# Altium PCB DIP.PcbDoc
Units mm, origin at the board's own origin, x right, y up, seen from the top; angles counter-clockwise.
Board outline 138.43 x 69.22 mm, 2 copper layers (Top Layer, Bottom Layer); 23 components, 20 nets, 83 pads, 5 vias.
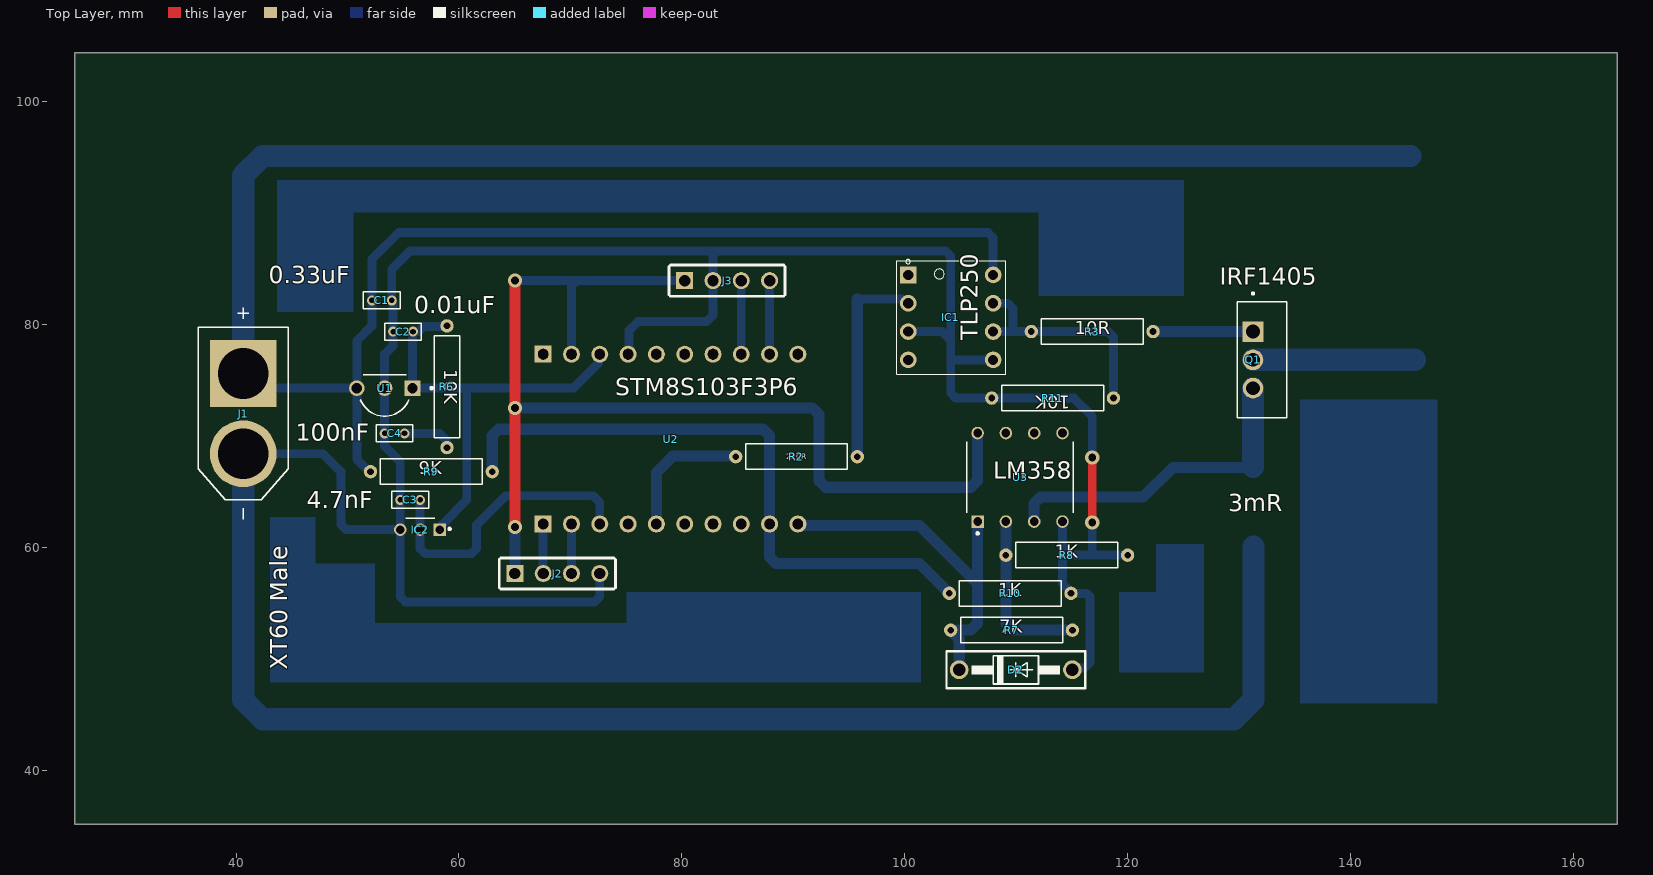
[diagram p0: Top Layer view]
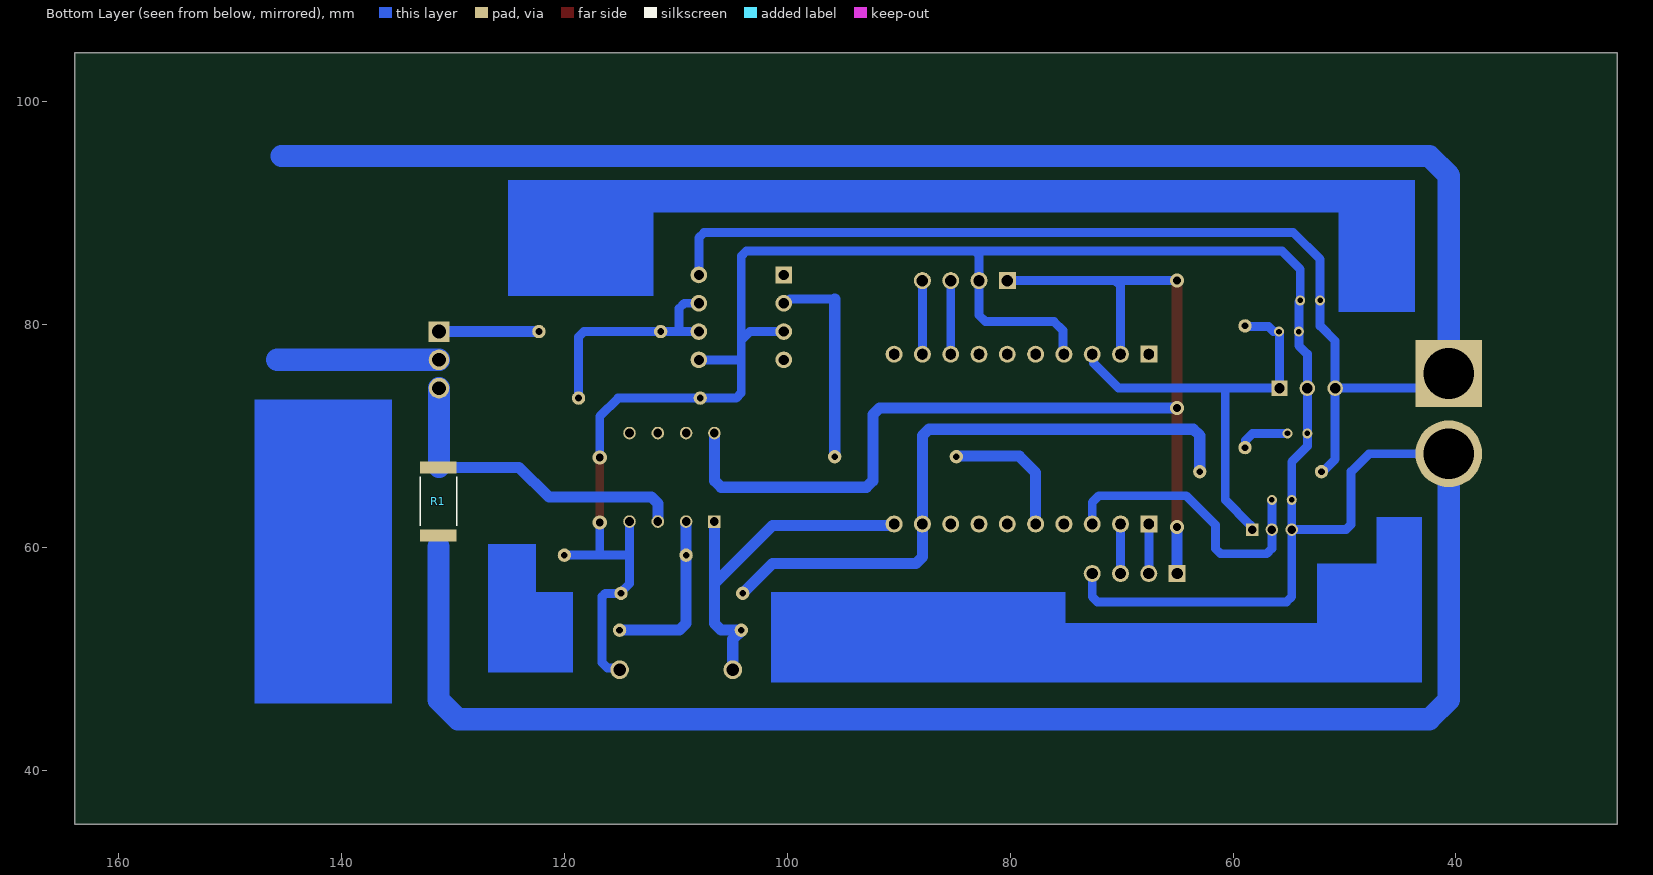
[diagram p1: Bottom Layer view, seen from below]

## Layer stack, top to bottom
Top Solder: solder mask 0.0102, Solder Resist, Dk 3.5
Top Layer: signal copper 0.0356
Dielectric 1: dielectric 0.32, FR-4, Dk 4.8
Bottom Layer: signal copper 0.0356
Bottom Solder: solder mask 0.0102, Solder Resist, Dk 3.5

## Board outline
25.527,35.179 25.527,104.394 163.957,104.394 163.957,35.179

## Design rules (kind name [scope] priority, off if disabled: settings)
Clearance [All] p1: gap=0.254 ignorepadtopadclearanceinfootprint=FALSE
PolygonConnect [All] p1: connectstyle=Relief reliefconductorwidth=0.254 reliefentries=4 polygonreliefangle="90 Angle" airgapwidth=0.254
RoutingVias [All] p1: holewidth=0.711 width=1.27 viastyle="Through Hole" minholewidth=0.711 minwidth=1.27 maxholewidth=0.711 maxwidth=1.27
SolderMaskExpansion [All] p1: expansion=0.102 istentingtop=FALSE
SupplyNets "Schematic Supply Nets" [InNet('GND')] p1: voltage=0.000
Width [All] p1: maxlimit=5 minlimit=0.254 preferedwidth=1 minimp=50.000000 maximp=50.000000 favimp=50.000000
30 further rules are at their usual default settings.

## Components (designator, comment, footprint, x,y, rotation, side; value= is the part's Value field where it differs from the comment)
C1 "0.33uF" CER-DIP-CAP 53.086,82.169 r180 top
C2 "0.01uF" CER-DIP-CAP 54.991,79.375 r0 top
C3 "4.7nF" CER-DIP-CAP 55.626,64.262 r0 top
C4 "100nF" CER-DIP-CAP 54.229,70.231 r0 top
D2 "3V3 1W zener" 1N4001 110.49,49.022 r0 top
IC1 "TLP250" DIP-8 104.775,80.645 r0 top
IC2 "US1881" UA 56.515,61.849 r180 top
J1 "XT60 Male" "XT60 Male Pin" 40.64,72.009 r270 top
J2 "1x4 CONN" CON1x4_2.54MM 65.024,57.658 r0 top
J3 "1x4 CONN" CON1x4_2.54MM 80.264,83.947 r0 top
Q1 "IRF1405" TO-220 132.08,76.835 r270 top
R1 "3mR" "RES 2512 SMD" 131.318,64.135 r90 bottom
R2 "220R" "RES DIP" 90.297,68.15 r0 top
R3 "10R" "RES DIP" 116.84,79.375 r0 top
R6 "10K" "RES DIP" 58.928,74.422 r270 top
R7 "7K" "RES DIP" 109.601,52.578 r0 top
R8 "1K" "RES DIP" 114.554,59.309 r0 top
R9 "9K" "RES DIP" 57.531,66.802 r180 top
R10 "1K" "RES DIP" 109.474,55.88 r180 top
R11 "10K" "RES DIP" 113.284,73.406 r180 top
U1 "TO-92 LM78L05" "TO-226 TO-92" 53.34,74.295 r180 top
U2 "STM8S103F3P6" "STM8S103F3P6 BLUE PILL" 67.564,62.103 r0 top
U3 "LM358" PDIP-8 110.363,66.294 r90 top

## Footprints (in the part's own frame and the unit in brackets; to place one, negate y for a bottom-side part, rotate by r counter-clockwise, add the part's x,y. Pads: shape width x height; smd on the part's side, far side on the other; paste and mask are expansions set on the pad)
1N4001 [mil]
  round 66 hole 44: A(180,0) C(-220,0)
  silkscreen extent -265,-65 225,65, body extent -236,-53 196,53, height 106
CER-DIP-CAP [mm]
  round 0.9 hole 0.5: 1(-0.889,0) 2(0.889,0)
  silkscreen extent -1.65,-0.76 1.65,0.76, body extent -1.51,-0.58 1.49,0.57, height 4
CON1x4_2.54MM [mil]
  rect 60x60 hole 40.16: 1(0,0)
  round 60 hole 40.16: 2(100,0) 3(200,0) 4(300,0)
  silkscreen extent -55,-55 355,55, body extent -50,-50 350,50, height 350
DIP-8 [mm]
  rect 1.5x1.5 / inner round 1.5 / far side rect 1.5x1.5 hole 0.9: 1(-4.445,3.81)
  round 1.5 hole 0.9: 2(-4.445,1.27) 3(-4.445,-1.27) 4(-4.445,-3.81) 5(3.175,-3.81) 6(3.175,-1.27) 7(3.175,1.27) 8(3.175,3.81)
  silkscreen extent -5.46,-5.08 4.32,5.2, body extent -4.44,-4.83 3.43,4.83, height 4.85
PDIP-8 [mm]
  rect 1.13x1.13 / inner round 1.13 / far side rect 1.13x1.13 hole 0.78: 1(-3.97,3.81)
  round 1.13 hole 0.78: 2(-3.97,1.27) 3(-3.97,-1.27) 4(-3.97,-3.81) 5(3.97,-3.81) 6(3.97,-1.27) 7(3.97,1.27) 8(3.97,3.81)
  silkscreen extent -5.13,-4.79 3.18,4.79, body extent -3.94,-4.79 3.94,4.79, height 5.08
"RES 2512 SMD" [mm]
  rect 1.07x3.27 smd: 1(-3.055,0) 2(3.055,0)
  silkscreen extent -2.2,-1.63 2.2,1.63, body extent -3.17,-1.6 3.17,1.6, height 0.65
"RES DIP" [mm]
  round 1.2 hole 0.6: 1(-5.461,0) 2(5.461,0)
  silkscreen extent -4.57,-1.14 4.57,1.14, body extent -5.93,-1.3 5.93,1.3, height 2.8
"STM8S103F3P6 BLUE PILL" [mil]
  rect 60x60 hole 36 slot 37.8 at 90 deg: 1(0,0) 11(0,600)
  round 60 hole 36 slot 37.8 at 90 deg: 2(100,0) 3(200,0) 4(300,0) 5(400,0) 6(500,0) 7(600,0) 8(700,0) 9(800,0) 10(900,0) 12(100,600) 13(200,600) 14(300,600) 15(400,600) 16(500,600) 17(600,600) 18(700,600) 19(800,600) 20(900,600)
  body extent -60,-64 1126,664, height 693
TO-220 [mm]
  rect 1.845x1.845 / inner round 1.845 / far side rect 1.845x1.845 hole 1.23: 1(-2.54,-0.81)
  round 1.845 hole 1.23: 2(0,-0.81) 3(2.54,-0.81)
  silkscreen extent -6.06,-2.22 5.21,2.22, body extent -5.21,-2.22 5.21,2.22, height 19.3
"TO-226 TO-92" [mm]
  rect 1.4x1.4 / inner round 1.4 / far side rect 1.4x1.4 hole 0.93: 1(-2.5,0)
  round 1.4 hole 0.93: 2(0,0) 3(2.5,0)
  silkscreen extent -4.3,-1.19 2.18,2.5, body extent -2.74,-1.27 2.74,2.33, height 8.09
UA [mm]
  rect 1.12x1.12 / inner round 1.12 / far side rect 1.12x1.12 hole 0.77: 1(-1.778,0.254)
  round 1.12 hole 0.77: 2(0,0.254) 3(1.778,0.254)
  silkscreen extent -2.75,-0.75 1.31,0.28, body extent -2.05,-0.93 2.05,0.57, height 4.95
"XT60 Male Pin" [mm]
  round 6 hole 4.55: N(3.6,0)
  rect 6x6 / inner round 6 / far side rect 6x6 hole 4.55: P(-3.6,0)
  silkscreen extent -9.5,-4.05 9.5,4.05, body extent -7.75,-4.05 7.75,4.05, height 16.5

## Part data
C1 C2 C3 C4: library part "CAP DIP"
D2: library part 1N4001, "Diode"
IC1: library part TLP250-DIP
J1: library part "XT60 Male Pin"
J2 J3: library part CON1x4_2.54mm
Q1: library part "TO-220 MOSFET"
R1: library part "RES SMD 2512 SHUNT"
R2 R3 R6 R7 R8 R9 R10 R11: library part "RES DIP"
U1: library part TO-92
U2: library part "STM8S103F3P6 BLUE PILL"
U3: library part "LM358 - DIP"

## Via types
v1: diameter 1.27, hole 0.711, Top Layer to Bottom Layer, 5 vias

## Nets (pads, with @x,y where several pads share a name; then routed paths per layer and width w, separated by ;. In a path a pad name is that pad's centre, name@x,y a point inside that pad or via, vN(x,y) a via of type N, cw(c..) or ccw(c..) an arc to the next point about the centre after c; other vN are vias at no path point)
3.3V: J2.1 J3.1 U2.12 U3.8 | length 100.8
  Top Layer w1: v1(65.024,61.849) v1(65.024,83.947)
  Bottom Layer w0.8: v1(65.024,83.947) 70.573,83.947 ; U2.12 70.104,83.478 70.573,83.947 ; J3.1 70.573,83.947
  Bottom Layer w1: J2.1 v1(65.024,61.849) ; v1(65.024,72.517) 91.743,72.517 92.329,71.931 92.329,65.991 92.915,65.405 105.967,65.405 106.553,65.991 U3.8
3S-6S: C1.2 IC1.8 J1.P R9.2 U1.3 | length 214.5
  Bottom Layer w0.8: J1.P 41.954,74.295 U1.3 ; R9.2 51.962,66.802 50.84,67.924 U1.3 ; IC1.8 107.95,87.796 107.481,88.265 54.61,88.265 52.197,85.852 C1.2 52.197,79.883 50.84,78.526 U1.3
  Bottom Layer w2: J1.P 40.64,93.366 42.397,95.123 145.415,95.123
5V: C2.2 IC2.1 R6.1 U1.1 U2.13 | length 40.5
  Bottom Layer w0.8: IC2.1 58.453,61.755 58.453,62.009 60.706,64.262 60.706,74.295 ; R6.1 58.89,79.845 56.836,79.845 56.366,79.375 C2.2 55.84,79.335 U1.1 60.706,74.295 ; U2.13 72.544,77.243 72.544,76.565 70.273,74.295 60.706,74.295
ADC1: R9.1 R10.2 U2.9 | length 57
  Bottom Layer w1: R9.1 62.992,70.026 63.578,70.612 87.298,70.612 87.884,70.026 U2.9 87.884,59.133 88.47,58.547 101.346,58.547 R10.2
ADC2: D2.C R7.1 U2.10 U3.1 | length 34.2
  Bottom Layer w1: U2.10@90.255,61.976 90.282,62.003 90.895,62.003 90.922,61.976 101.346,61.976 106.553,56.769 ; D2.C 104.902,51.762 104.14,52.524 R7.1 105.967,52.578 106.553,53.164 106.553,56.769 ; U3.1 106.553,56.769
GND: C1.1 C2.1 C3.1 C4.1 D2.A IC1.3 IC1.5 IC2.3 J1.N J2.4 J3.2 R1.1 R8.2 R10.1 R11.2 U1.2 U2.14 U3.4 | length 334.1
  Top Layer w0.8: v1(116.84,62.23) v1(116.84,68.072)
  Bottom Layer w0.8: J1.N 47.796,68.409 49.403,66.802 49.403,62.064 49.872,61.595 IC2.3 ; J2.4 72.644,55.587 72.175,55.118 55.206,55.118 54.737,55.587 IC2.3 ; U2.14 75.284,77.443 75.284,79.475 76.073,80.264 82.218,80.264 82.804,80.85 J3.2 82.804,86.233 83.185,86.614 ; IC1.3 103.378,79.375 104.14,78.613 ; IC1.5 104.267,76.835 104.14,76.708 ; U3.4 114.173,59.537 ; D2.A 115.23,49.19 116.158,49.19 116.627,49.658 116.627,55.585 116.332,55.88 R10.1 114.935,55.988 114.173,56.75 114.173,59.537 ; v1(116.84,62.23) 116.84,59.309 ; v1(116.84,68.072) 116.84,71.755 115.189,73.406 R11.2 104.609,73.406 104.14,73.875 104.14,76.708 ; R8.2 116.84,59.309 ; IC2.3 C3.1 54.737,67.691 53.34,69.088 C4.1 U1.2 53.34,77.343 54.102,78.105 C2.1 54.102,82.042 C1.1 53.975,84.963 55.626,86.614 83.185,86.614 ; 83.185,86.614 103.671,86.614 104.14,86.145 104.14,78.613 ; 104.14,76.708 104.14,78.613 ; 114.173,59.537 114.401,59.309 116.84,59.309
  Bottom Layer w2: J1.N 40.64,46.334 42.397,44.577 129.561,44.577 131.318,46.334 131.318,60.071
HallOut: C3.2 IC2.2 U2.3 | length 26.3
  Bottom Layer w0.8: C3.2 56.515,59.905 56.984,59.436 61.126,59.436 61.595,59.905 61.595,62.025 64.213,64.643 72.058,64.643 72.644,64.057 U2.3
Negative: Q1.2 | length 14.5
  Bottom Layer w2: Q1.2 145.796,76.835
NetC4_2: C4.2 R6.2 | length 4.7
  Bottom Layer w0.8: C4.2 58.242,70.231 58.89,69.583 58.89,68.999 R6.2
NetD1_A: 
NetQ1_1: Q1.1 R3.2 | length 9
  Bottom Layer w1: R3.2 Q1.1
NetR2_2: IC1.2 R2.2 | length 18.9
  Bottom Layer w0.8: 95.758,82.296 99.76,82.296 100.141,81.915 IC1.2
  Bottom Layer w1: R2.2 95.758,82.296
NetR3_1: IC1.6 IC1.7 R3.1 R11.1 | length 20.6
  Bottom Layer w0.8: IC1.6 109.664,79.375 ; IC1.7 109.259,81.915 109.728,81.446 109.728,79.438 109.664,79.375 ; R11.1 118.745,78.906 118.276,79.375 R3.1 109.664,79.375
NetR7_2: R7.2 R8.1 U3.2 | length 15.4
  Bottom Layer w1: U3.2 109.093,53.164 109.679,52.578 R7.2
Rx: J3.3 U2.18 | length 6.6
  Bottom Layer w0.8: U2.18 J3.3
SCL: J2.3 U2.2 | length 4.4
  Bottom Layer w0.8: J2.3 U2.2
SDA: J2.2 U2.1 | length 4.4
  Bottom Layer w0.8: J2.2 U2.1
ShontAdc: Q1.3 R1.2 U3.3 | length 29.8
  Bottom Layer w1: U3.3@111.608,62.349 111.608,63.93 112.194,64.516 121.412,64.516 124.086,67.19 R1.2@131.305,67.19 ; R1.2@131.27,67.225 R1.2@131.305,67.19 ; R1.2 R1.2@131.305,67.19
  Bottom Layer w2: R1.2@131.27,67.225 Q1.3
TLP_in: R2.1 U2.5 | length 12.4
  Bottom Layer w1: U2.5 77.724,66.724 79.199,68.199 84.645,68.199 84.656,68.188 84.829,68.188 R2.1@84.839,68.199
Tx: J3.4 U2.19 | length 6.6
  Bottom Layer w0.8: U2.19 J3.4
pads on no net: IC1.1 IC1.4 U2.4 U2.6 U2.7 U2.8 U2.11 U2.15 U2.16 U2.17 U2.20 U3.5 U3.6 U3.7

## Other copper
Bottom Layer:
  rectangle: 75.057,53.213 101.473,56.007
  rectangle: 52.451,47.879 101.473,53.213
  rectangle: 47.117,47.879 52.451,58.547
  rectangle: 43.053,47.879 47.117,62.738
  rectangle: 43.688,81.153 50.546,90.043
  rectangle: 43.688,90.043 112.014,92.964
  rectangle: 135.509,45.974 147.828,73.279
  rectangle: 119.253,48.768 122.555,56.007
  rectangle: 122.555,48.768 126.873,60.325
  rectangle: 112.014,82.55 125.095,92.964